# EAGLE board optodist 1.2 smt (EAGLE 6.5.0)
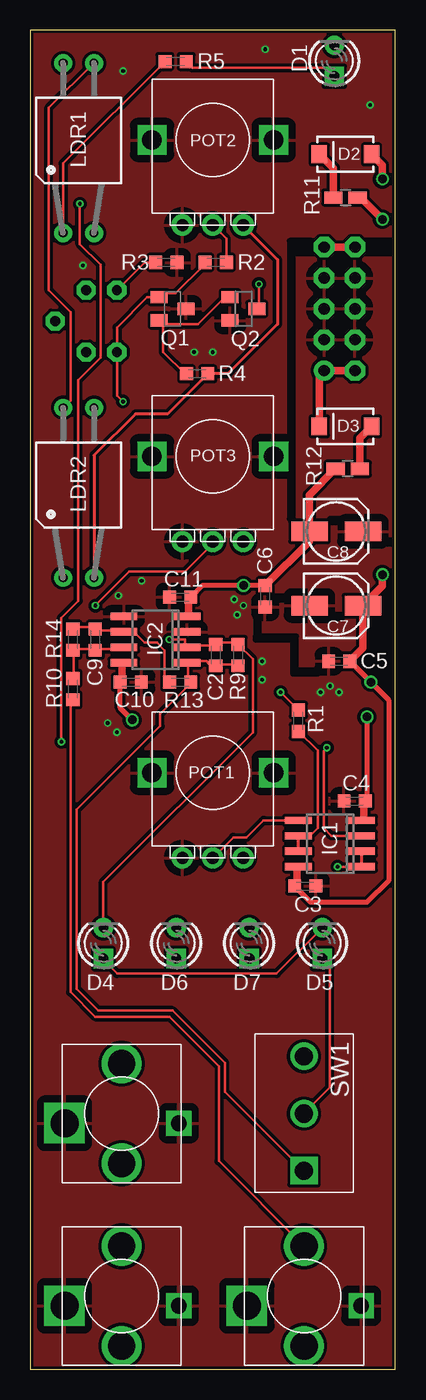
[diagram p0: board, top side]
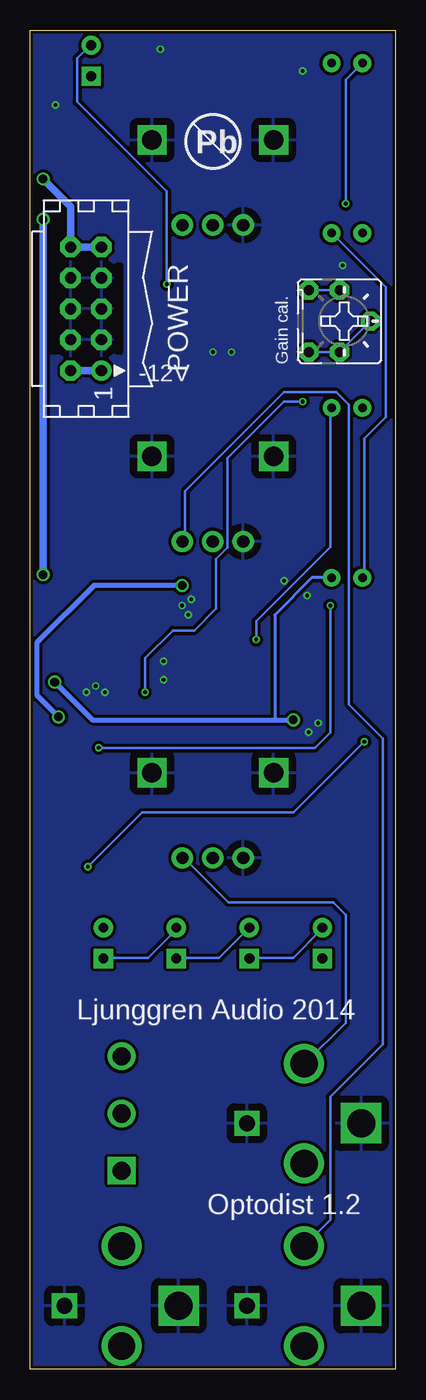
[diagram p1: board, bottom side, seen from below]

Size 30 x 110 mm. Coordinates in mm from the lower left corner, seen from the top.
Outline: 30,0 30,110 0,110 0,0 30,0
Copper layers (1*16): Top 0.035mm / dielectric 1.5mm / Bottom 0.035mm
Design rules "hackvana 15 mil pads 24 mil thermal *": minimum track width 0.22mm, minimum drill 0.3mm, track to track 6mil, track to pad 6mil, pad to pad 6mil, via to via 6mil, smd to smd 0mil, copper to edge 6mil, drill to drill 6mil, minimum pad ring 15mil, minimum via ring 6mil, stop-mask expansion 2mil, vias tented up to drill 100mil, thermal gap 24mil
tRestrict: area 27.7,91.7 to 30,92.7; area 21.6,91.7 to 23.1,92.7; area 21.3,69.8 to 21.6,92.7; area 29.2,67.8 to 30,68.1; area 24.6,69.6 to 25.4,69.8; area 20.3,63.2 to 20.8,63.5; area 24.9,61.7 to 25.7,62; area 21.8,57.1 to 23.6,57.4; area 21.6,57.1 to 21.8,60.2; area 18.5,59.9 to 21.6,60.2; area 18.5,60.2 to 18.8,61.7
bRestrict: area 22.6,83.6 to 22.9,90.7; area 27.9,83.6 to 28.2,90.4

## Footprints (pad centres in the part's own frame; a part is rotated, then mirrored left to right if it is on the bottom)
C0603K = smd 1.05 x 1.08: 1 -0.875,0; 2 0.875,0
153CLV-0505 = smd 3 x 1.6: + 2.2,0; - -2.2,0
ERTHENVAR = drill 2.3 pad 3 square: RING1 -4.7,-0.8 | drill 1.3 pad 1.778 square: RING2 4.7,-0.8 | drill 2.25 pad 3: SHUNT 0,-4.1; TIP 0,4.1
LED3MM = drill 0.813 square: A -1.27,0 | drill 0.813: K 1.27,0
SMA-DIODE = smd 1.27 x 1.47: A -2.15,0; C 2.15,0
SO08 = smd 0.6 x 2.2: 1 -1.905,-2.6; 2 -0.635,-2.6; 3 0.635,-2.6; 4 1.905,-2.6; 5 1.905,2.6; 6 0.635,2.6; 7 -0.635,2.6; 8 -1.905,2.6
VTL5C = drill 0.7 pad 1.3: 1 -7.62,1.27; 2 -7.62,-1.27; 3 6.35,1.27; 4 6.35,-1.27
POT-ALPHA9 = drill 1.6 pad 2.184 square: GND$1 -5,0; GND$2 5,0 | drill 1: LEFT -2.5,-7; MID 0,-7; RIGHT 2.5,-7
CON10L = drill 0.914: 1 5.08,1.27 | drill 0.914 octagon: 2 5.08,-1.27; 3 2.54,1.27; 4 2.54,-1.27; 5 0,1.27; 6 0,-1.27; 7 -2.54,1.27; 8 -2.54,-1.27; 9 -5.08,1.27; 10 -5.08,-1.27
SOT23-BEC = smd 1 x 1.4: B -0.95,-1.1; C 0,1.1; E 0.95,-1.1
SOT23 = smd 1 x 1.4: 1 -0.95,-1.1; 2 0.95,-1.1; 3 0,1.1
R0805W = smd 1.5 x 1: 1 -1,0; 2 1,0
SPDT-HORIZONTAL-TOP-SUBMINI-MULTICOMP = drill 1.5 square: 1 4.7,0 | drill 1.5: 2 0,0; 3 -4.7,0
B25P = drill 0.813 octagon: A -2.54,0; AA -2.54,-2.54; E 2.54,0; EE 2.54,-2.54; S 0,2.54

## Placement (x,y rotation side)
C2  100pF  [C0603K]  15.24,58.67 270 top
C3  100nF  [C0603K]  22.61,39.69 0 top
C4  100nF  [C0603K]  26.67,46.67 0 top
C5  100nF  [C0603K]  25.4,58.17 180 top
C6  100nF  [C0603K]  19.3,63.5 90 top
C7  10uF  [153CLV-0505]  25.15,62.74 0 top
C8  10uF  [153CLV-0505]  25.15,68.83 0 top
C9  100pF  [C0603K]  5.33,59.94 270 top
C10  100nF  [C0603K]  8.26,56.45 0 top
C11  100nF  [C0603K]  12.32,63.44 0 top
CV  ERTHENVAR_3.5MM_JACKHOLES  [ERTHENVAR]  7.5,21 0 top
D1  [LED3MM]  25,107.5 90 top
D2  SB130  [SMA-DIODE]  25.91,99.82 180 top
D3  SB130  [SMA-DIODE]  25.91,77.47 180 top
D4  [LED3MM]  6,35 90 top
D5  [LED3MM]  24,35 90 top
D6  [LED3MM]  12,35 90 top
D7  [LED3MM]  18,35 90 top
IC1  TL072  [SO08]  24.64,43.18 90 top
IC2  TL072  [SO08]  10.29,59.94 90 top
IN  ERTHENVAR_3.5MM_JACKHOLES  [ERTHENVAR]  7.5,6 0 top
LDR1  SR2/SR3  [VTL5C]  3.96,100.97 90 top
LDR2  SR2/SR3  [VTL5C]  3.96,72.64 90 top
OUT  ERTHENVAR_3.5MM_JACKHOLES  [ERTHENVAR]  22.5,6 0 top
POT1  100K lin  [POT-ALPHA9]  15,49 0 top
POT2  25K lin  [POT-ALPHA9]  15,101 0 top
POT3  100K log  [POT-ALPHA9]  15,75 0 top
POWER  [CON10L]  25.43,87.12 270 bottom
Q1  BC857B  [SOT23-BEC]  11.68,87.12 270 top
Q2  BC847B  [SOT23]  17.53,87.12 270 top
R1  68K  [C0603K]  22.03,53.28 90 top
R2  100K  [C0603K]  15.24,90.93 180 top
R3  100R  [C0603K]  11.18,90.93 180 top
R4  4.7M  [C0603K]  13.72,81.79 0 top
R5  1K  [C0603K]  11.94,107.44 180 top
R9  68K  [C0603K]  17.08,58.67 90 top
R10  1K  [C0603K]  3.49,55.88 270 top
R11  10R  [R0805W]  25.91,96.27 0 top
R12  10R  [R0805W]  26.1,73.98 180 top
R13  10K  [C0603K]  12.32,56.45 180 top
R14  10K  [C0603K]  3.49,59.94 270 top
SW1  ON-OFF  [SPDT-HORIZONTAL-TOP-SUBMINI-MULTICOMP]  22.5,21 270 top
TRIM1  2K  [B25P]  4.57,86.11 270 bottom

## Library data of the parts
C2-C11 CV D1 D4-D7 IC1 IC2 IN OUT POT1-POT3 R1-R5 R9-R14 SW1 TRIM1 = Roll Your Own
D2 D3 = SparkFun-DiscreteSemi; PROD_ID: DIO-09886; VALUE: B340A
LDR1 LDR2 = Roll Your Own; MF: VACTEC PHOTO; MPN: VTL5C9; OC_FARNELL: 2067857; OC_NEWARK: 95F9033
POWER = Roll Your Own; OC_FARNELL: unknown; OC_NEWARK: unknown
Q1 = transistor-pnp
Q2 = transistor-npn

## Nets
0V: C3.2 C4.1 C5.2 C6.1 C7.- C8.+ C10.2 C11.1 CV.RING1 CV.RING2 IC2.3 IC2.5 IN.RING1 IN.RING2 OUT.RING1 OUT.RING2 POT1.GND$1 POT1.GND$2 POT1.LEFT POT2.GND$1 POT2.GND$2 POT2.LEFT POT3.GND$1 POT3.GND$2 POT3.LEFT POWER.3 POWER.4 POWER.5 POWER.6 POWER.7 POWER.8 Q1.C Q2.2 R3.1
+12V: C3.1 C5.1 C7.+ C10.1 IC1.8 IC2.8 LDR2.2 POT2.RIGHT R4.2 R11.2
-12V: C4.2 C6.2 C8.- C11.2 IC1.4 IC2.4 R12.2
AUDIO_IN: IC1.3 POT3.MID
AUDIO_OUT: C2.2 IC2.1 R9.1 R13.1 SW1.1
CV_IN: D1.A R5.1
N$1: IC1.6 IC1.7 R1.1
N$2: POT2.MID R2.1
N$3: Q1.B R1.2 R2.2 TRIM1.E TRIM1.EE TRIM1.S
N$4: Q1.E Q2.1 R4.1
N$5: CV.TIP POT1.RIGHT
N$6: D1.K Q2.3
N$7: R3.2 TRIM1.A TRIM1.AA
N$8: IN.TIP POT3.RIGHT
N$9: OUT.TIP R10.2
N$10: IC1.1 IC1.2 LDR1.3
N$11: D2.C R11.1
N$12: C2.1 D4.K D6.A IC2.2 LDR2.4 R9.2
N$13: LDR1.1 R5.2
N$14: LDR1.2 LDR2.1
N$15: LDR1.4 LDR2.3
N$16: D3.A R12.1
N$17: C9.2 IC2.7 R10.1 R14.2
N$18: D3.C POWER.1 POWER.2
N$19: D2.A POWER.9 POWER.10
N$21: C9.1 IC2.6 R13.2 R14.1
N$22: IC1.5 POT1.MID
N$25: D4.A D5.K
N$26: D6.K D7.A
N$27: D5.A D7.K SW1.2

## Tracks (layer width: path | path; a pad name or v marks a point on that pad's centre or on a via)
0V  (via drill 0.3)
  other vias: 24.64,56.13 25.4,55.63 23.88,55.63 17.53,62.74 16.76,63.25 17.02,61.98 27.94,103.89 19.05,56.64 19.05,58.17 6.35,53.09 7.11,52.32 14.99,83.57 13.46,83.57 7.62,106.68 19.3,108.46 4.32,90.68 9.14,64.77 7.24,63.56
  pour Top (isolate 0.254): 0,0 0,110 30,110 30,0
  pour Bottom (isolate 0.254): 0.03,0 0.03,109.98 30,109.98 30,0
+12V  (via drill 0.7)
  Top 0.254: LDR2.2 5.24,75.08 8.64,78.49 11.29,78.49 R4.2 16.26,81.79 20.32,85.85 20.32,91.18 POT2.RIGHT
  Top 0.406: C3.1 23.06,38.35 27.69,38.35 29.46,40.13 29.46,54.98 C5.1 26.29,58.17 v28,56.45 | v8.38,53.34 7.38,54.34 C10.1
  Top 0.61: v28.96,65.28 28.96,64.35 C7.+ 27.35,59.24 C5.1 | C3.1 21.91,39.86 21.91,41.15 IC1.8 | IC2.8 7.56,57.91 7.56,56.63 C10.1 | v28.96,94.49 27.43,96.01 R11.2
  Bottom 0.254: LDR2.2 6.86,65.02 9.91,61.98 9.91,53.34
  Bottom 0.406: v28,56.45 24.89,53.34 9.91,53.34 v8.38,53.34
  Bottom 0.61: v28.96,94.49 v28.96,65.28
-12V  (via drill 0.7)
  Top 0.406: C11.2 14.13,64.38 C6.2 17.54,64.38 v17.53,64.39 | v27.69,53.59 27.69,46.81 C4.2
  Top 0.61: R12.2 22.95,71.83 C8.- 22.95,68.02 C6.2 | IC1.4 27.3,45.09 27.43,45.21 27.43,46.56 C4.2 | IC2.4 13.02,61.98 13.02,63.26 C11.2
  Bottom 0.406: v17.53,64.39 24.77,64.39 29.46,59.69 29.46,55.37 v27.69,53.59
AUDIO_IN  (via drill 0.3)
  Top 0.22: IC1.3 24.77,43.81 24.13,44.45 24.13,50.8 v24.38,51.05 | v5.33,62.74 8.13,65.53 12.7,65.53 15,67.83 POT3.MID
  Bottom 0.22: v24.38,51.05 6.6,51.05 5.33,52.32 v5.33,62.74
AUDIO_OUT
  Top 0.22: 15.24,57.91 17.02,57.91 R9.1 | 15.24,57.91 14.73,57.91 14.48,58.17 12.95,58.17 IC2.1 12.95,57.91 12.95,56.64 R13.1 12.95,56.13 10.67,53.85 10.67,52.83 3.81,45.97 3.81,31.24 5.59,29.46 11.68,29.46 16,25.15 16,22.8 SW1.1 | 15.24,57.91 C2.2
CV_IN
  Top 0.22: R5.1 13.32,106.93 24.3,106.93 D1.A
N$1
  Top 0.22: R1.1 23.62,50.81 23.62,44.45 22.99,43.81 IC1.6
  Top 0.254: IC1.7 IC1.6
N$2
  Top 0.22: R2.1 16.11,92.89 POT2.MID
N$3  (via drill 0.3)
  Top 0.22: R2.2 14.22,90.93 14.22,90.68 11.94,88.39 10.92,88.39 10.67,88.14 Q1.B 9.59,88.07 7.11,85.6 TRIM1.EE 7.11,80.01 v7.62,79.5 | 22.1,54.22 R1.2 21.84,54.36 v20.57,55.63
  Bottom 0.22: TRIM1.EE TRIM1.E TRIM1.S | v20.57,55.63 20.57,58.42 18.29,60.71 16.51,60.71 14.73,62.48 14.73,66.55 13.78,67.5 13.78,74.87 9.14,79.5 v7.62,79.5
N$4
  Top 0.22: 10.92,85.85 10.92,83.57 12.7,81.79 R4.1 | 10.92,85.85 10.67,86.11 Q1.E | 16.26,87.88 Q2.1 16.3,87.95 15.88,87.95 13.78,85.85 10.92,85.85
N$5
  Bottom 0.22: POT1.RIGHT 17.27,41.91 13.72,38.35 5.08,38.35 4.06,37.34 4.06,28.45 7.37,25.15 CV.TIP
N$6  (via drill 0.3)
  Top 0.22: v18.8,89.15 18.8,87.12 Q2.3
  Bottom 0.22: v18.8,89.15 18.8,96.77 26.16,104.14 26.16,107.7 25.15,108.71 D1.K
N$7
  Top 0.22: 10.41,90.93 R3.2 9.4,90.93 TRIM1.AA
  Bottom 0.22: TRIM1.A TRIM1.AA
N$8
  Bottom 0.22: POT3.RIGHT 17.27,68.07 17.27,72.14 9.14,80.26 4.83,80.26 3.81,79.25 3.81,54.61 1.02,51.82 1.02,26.67 5.33,22.35 5.33,12.27 IN.TIP 7.37,10.16
N$9
  Top 0.22: R10.2 3.3,54.81 3.3,30.99 5.33,28.96 11.43,28.96 15.49,24.89 15.49,17.11 OUT.TIP
N$10  (via drill 0.3)
  Top 0.22: IC1.2 IC1.1 v25.27,41.27 | v2.54,51.56 2.54,61.72 3.94,63.12 3.94,81.28 5.78,83.12 5.78,90.74 4.06,92.46 v4.06,95.76
  Top 0.254: IC1.1 IC1.2
  Bottom 0.22: v25.27,41.27 20.83,45.72 8.38,45.72 v2.54,51.56 | v4.06,95.76 4.06,105.95 LDR1.3
N$11
  Top 0.61: D2.C 24.91,98.67 R11.1
N$12  (via drill 0.3)
  Top 0.22: v11.43,59.94 12.7,59.94 12.7,59.44 IC2.2 12.95,59.44 15.24,59.44 C2.1 15.24,59.69 17.02,59.69 R9.2 18.29,58.34 18.29,52.32 6,40.04 D4.K
  Bottom 0.22: D4.K 6.1,36.07 8.38,33.78 11.94,33.78 D6.A | v11.43,59.94 11.43,61.47 5.33,67.56 5.33,78.99 LDR2.4
N$13
  Top 0.22: R5.2 2.69,99.07 LDR1.1
N$14
  Bottom 0.22: LDR2.1 2.54,65.02 2.54,76.45 0.76,78.23 0.76,88.9 5.08,93.22 LDR1.2
N$15
  Top 0.22: LDR2.3 3.3,79.6 3.3,86.87 1.52,88.65 1.52,103.63 5.21,107.31 LDR1.4
N$16
  Top 0.61: D3.A 27.1,76.51 R12.1
N$17
  Top 0.22: R10.1 3.56,56.9 3.56,58.93 R14.2 3.56,59.18 5.33,59.18 | 5.33,59.18 7.62,59.18 IC2.7 | 5.33,59.18 C9.2
N$18
  Top 0.61: POWER.2 POWER.1 23.76,81.64 D3.C
  Bottom 0.61: POWER.2 24.64,82.04
N$19  (via drill 0.7)
  Top 0.61: POWER.10 POWER.9 | v28.96,97.79 28.96,98.92 D2.A
  Bottom 0.61: POWER.9 26.16,92.2 | POWER.10 26.7,95.53 v28.96,97.79
N$21
  Top 0.22: R14.1 3.56,60.96 5.33,60.96 C9.1 5.33,60.71 7.62,60.71 IC2.6 8.51,60.58 9.4,59.69 10.41,59.69 11.05,59.05 11.05,56.83 R13.2
N$22
  Top 0.22: POT1.MID 16.69,43.69 17.78,43.69 19.18,45.09 IC1.5
N$25
  Top 0.22: D5.K 20.24,32.51 7.11,32.51 6,33.62 D4.A
N$26
  Bottom 0.22: D6.K 12.19,36.07 14.48,33.78 17.78,33.78 D7.A
N$27
  Top 0.22: SW1.2 24.64,23.14 24.64,33.27 24.18,33.73 D5.A
  Bottom 0.22: D7.K 18.03,36.07 20.32,33.78 23.88,33.78 D5.A

## Text on the board
bPlace: Pb | Gain cal. | -12V | Ljunggren Audio 2014 | Optodist 1.2